# Altium PCB TMC5160_BOB_V1_2.PcbDoc
Units mm, origin at the board's own origin, x right, y up, seen from the top; angles counter-clockwise.
Board outline 36 x 28 mm, 4 copper layers (Top, GND, VM, Bottom), stack 1.64 mm thick; 47 components, 51 nets, 183 pads, 128 vias.
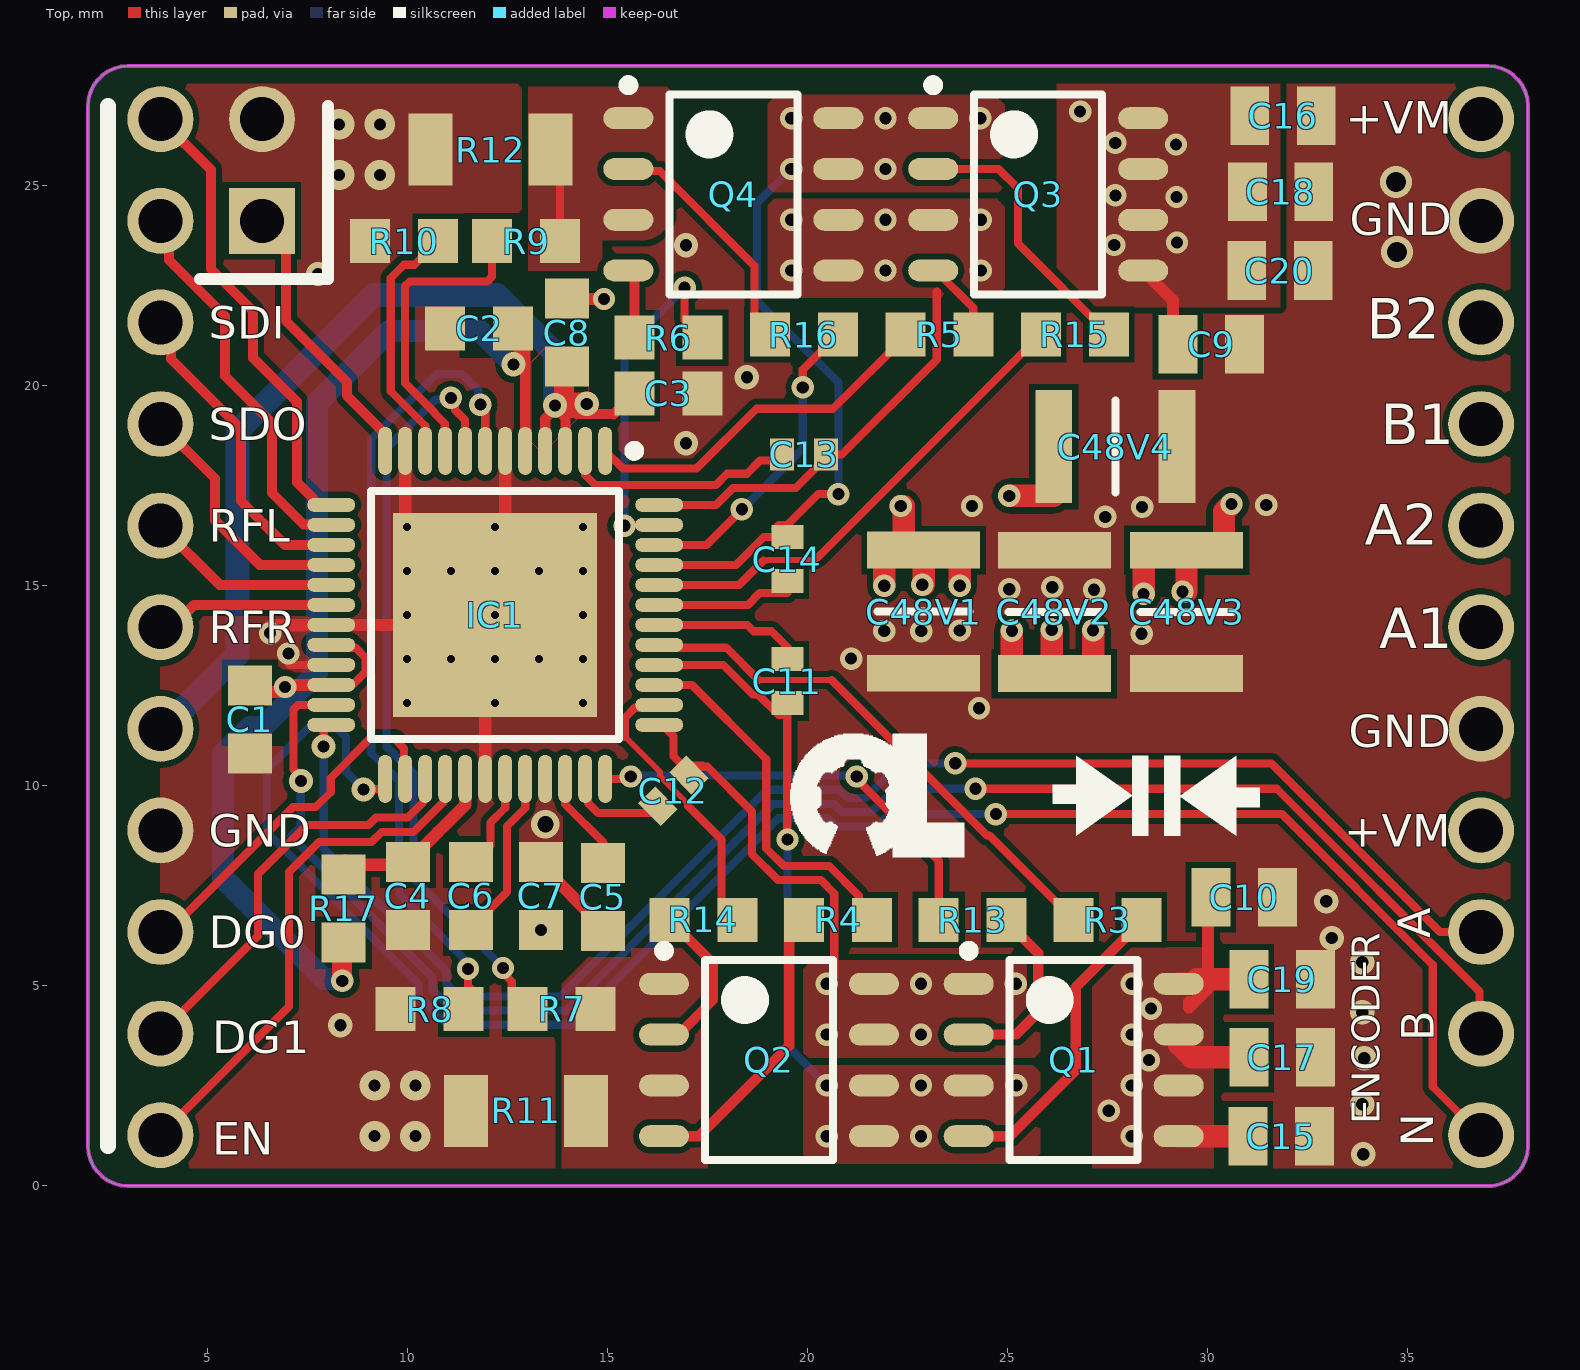
[diagram p0: Top view]
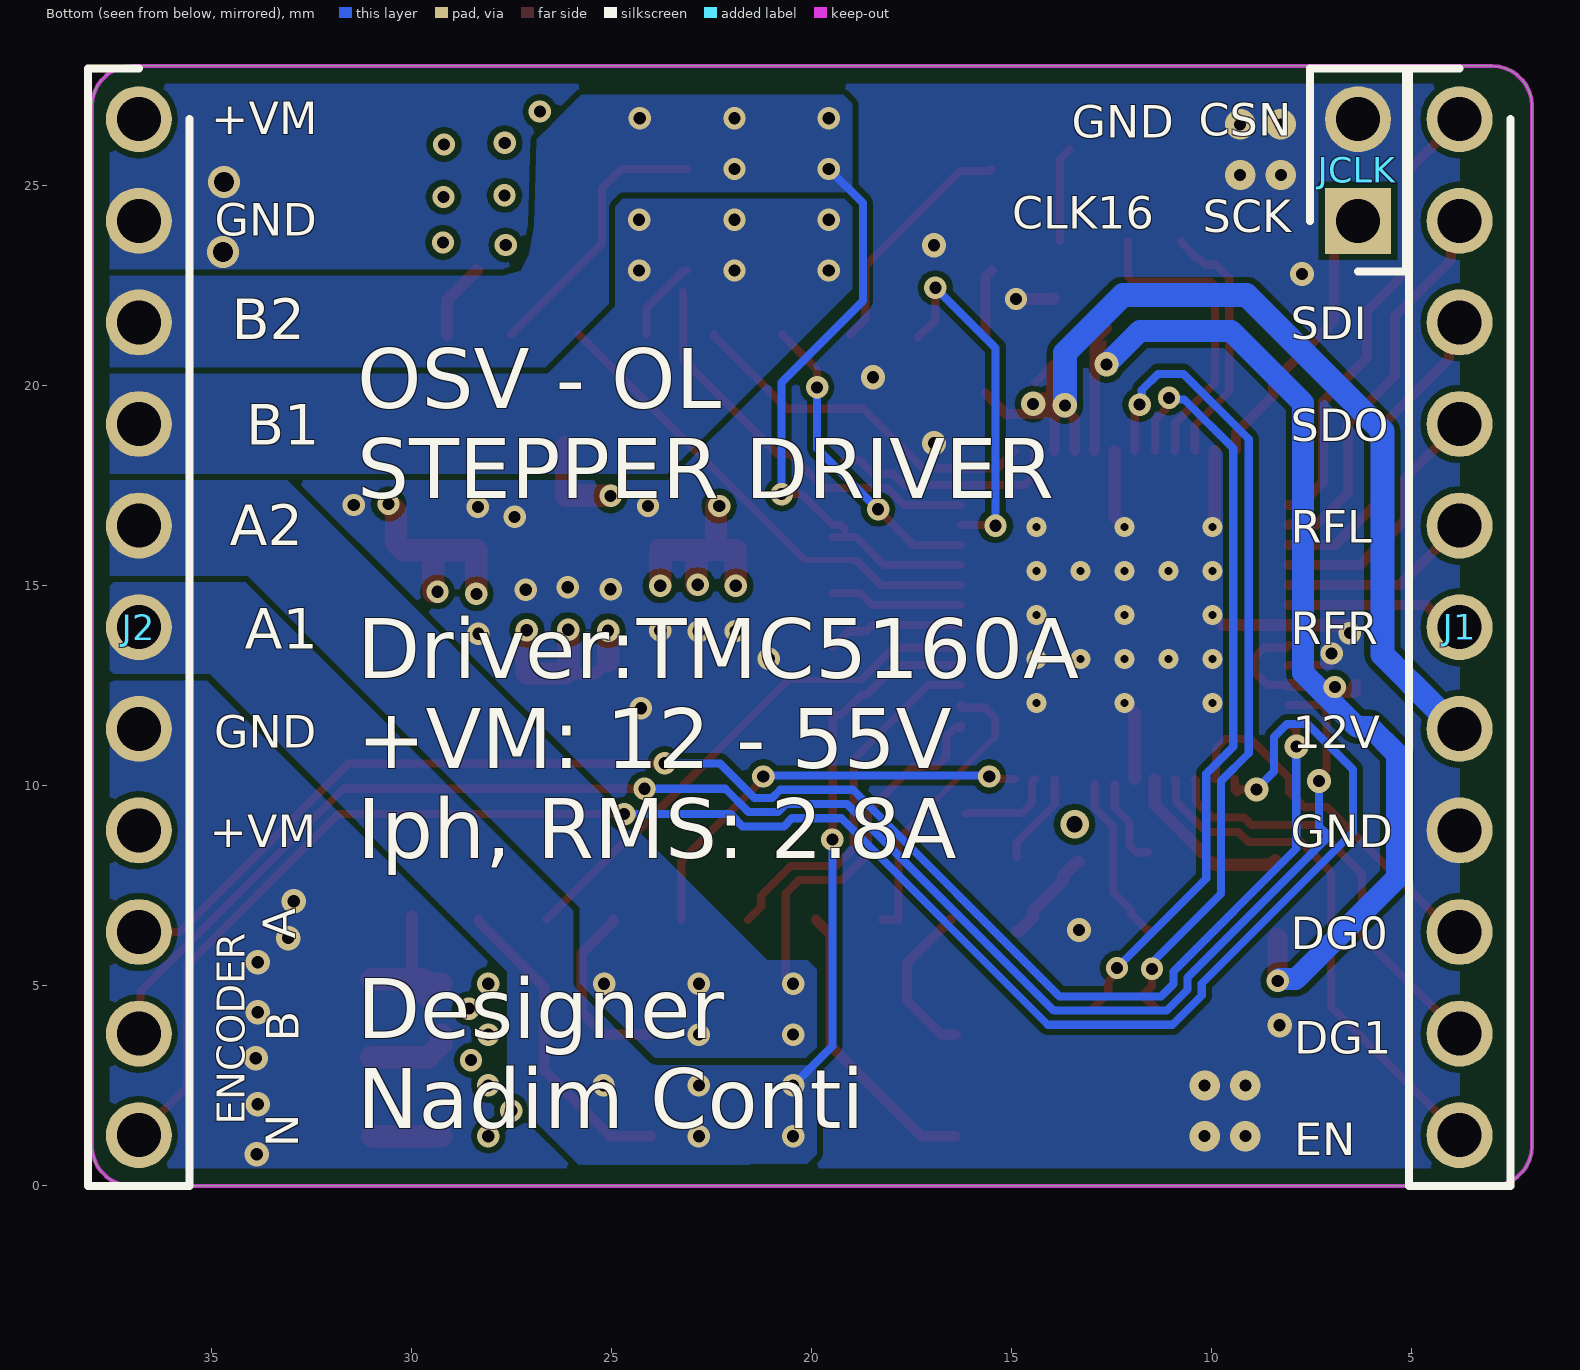
[diagram p1: Bottom view, seen from below]
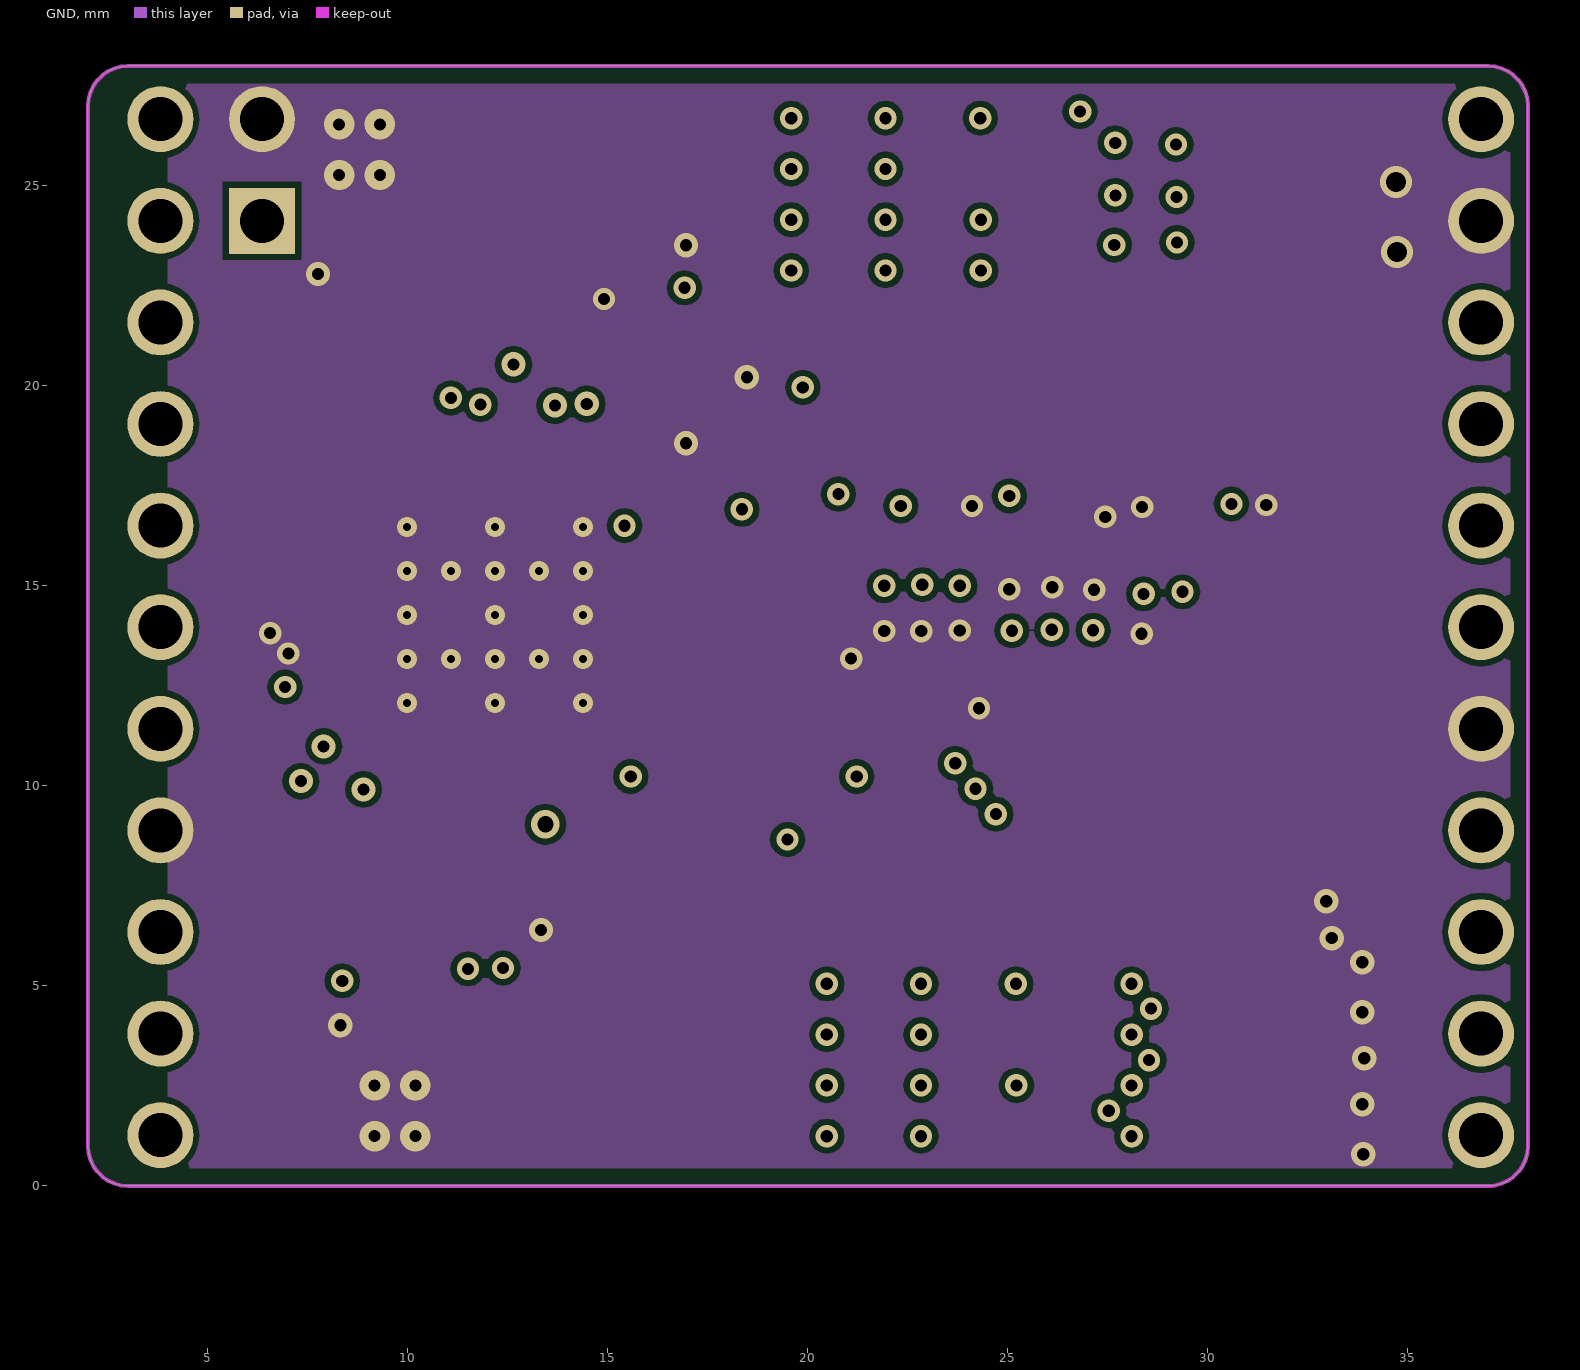
[diagram p2: GND]
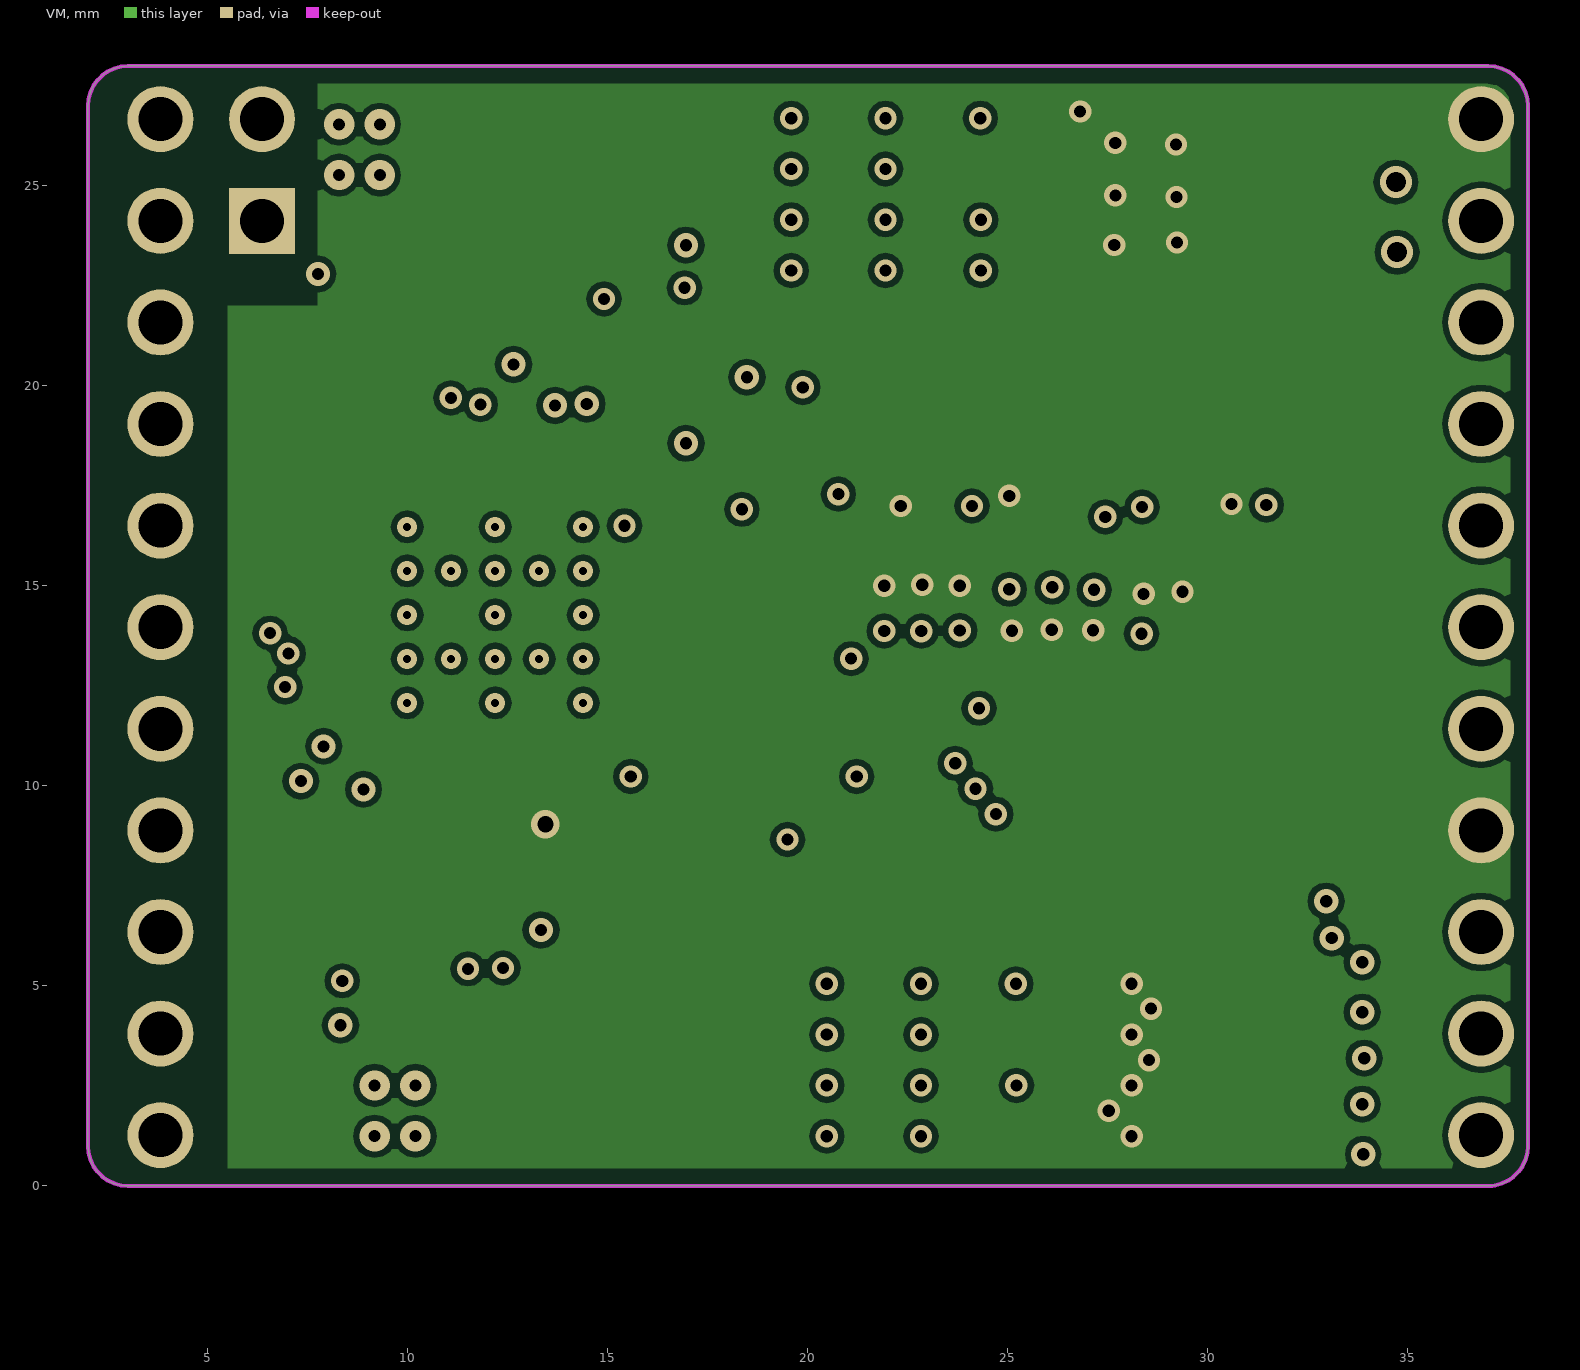
[diagram p3: VM]
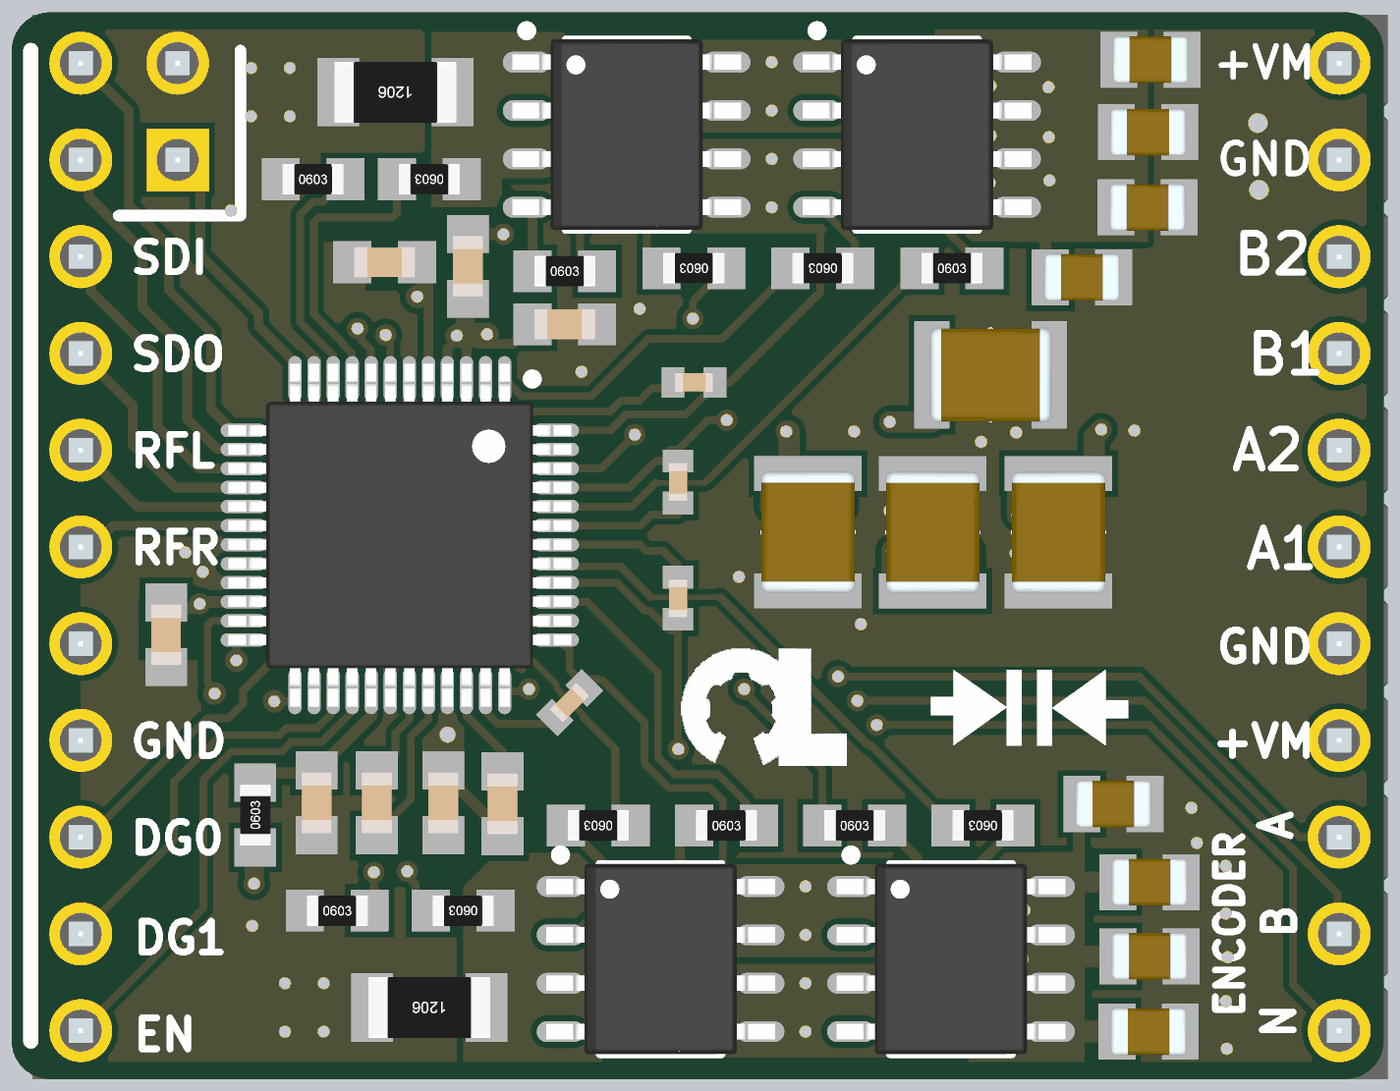
[diagram p4: 3D render of the assembled board from above, using the file's embedded part models]
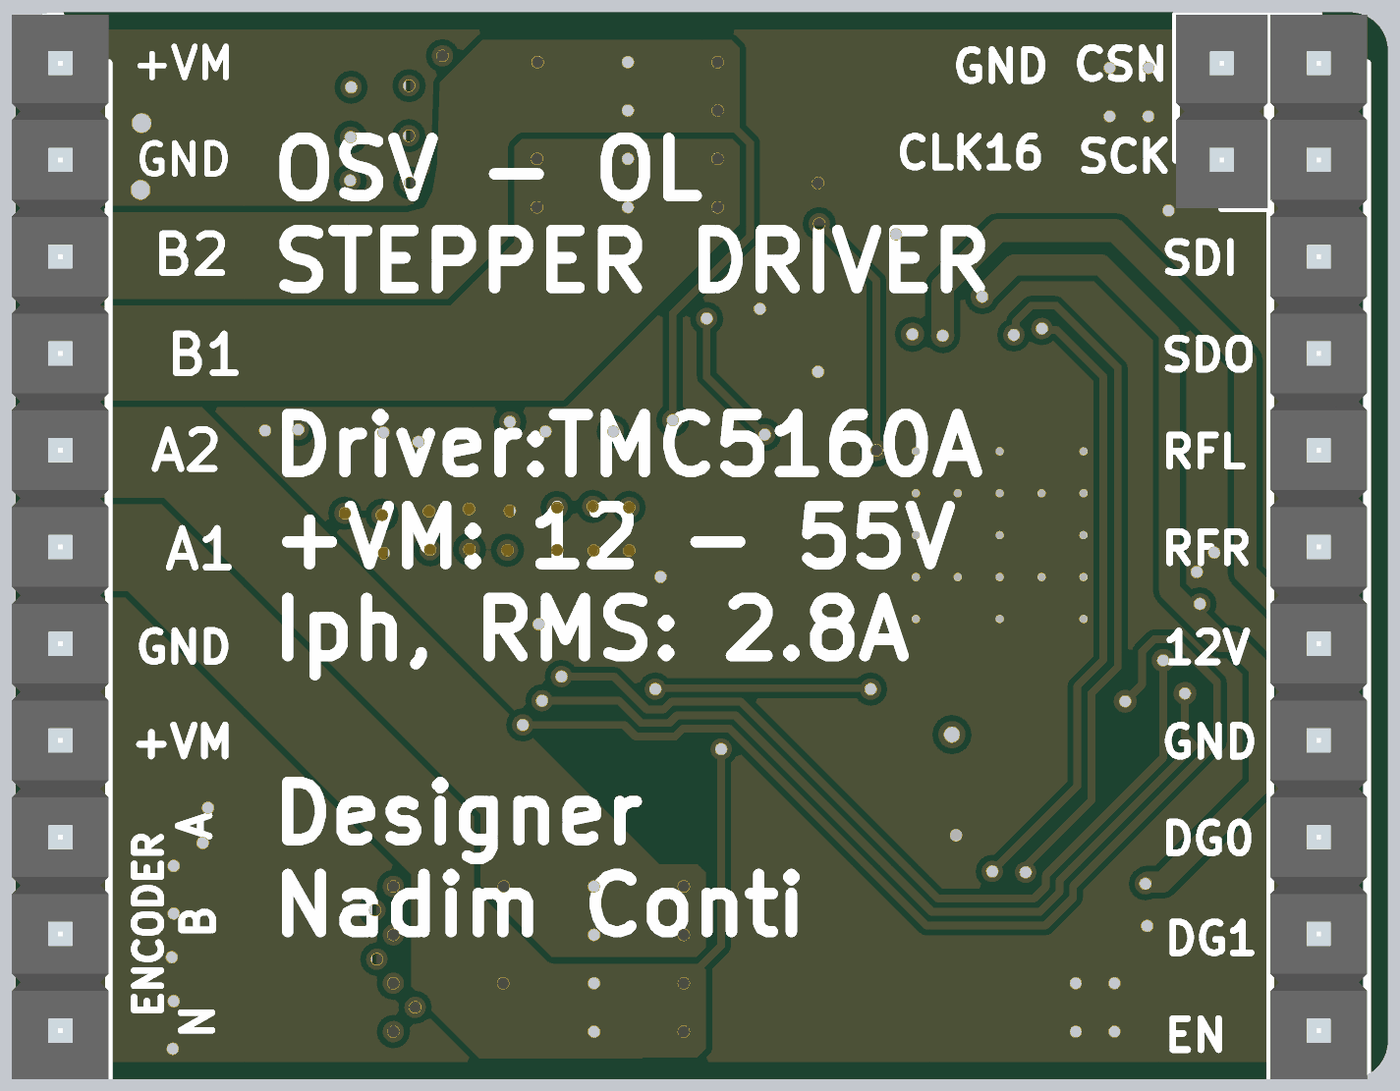
[diagram p5: 3D render of the assembled board from below, using the file's embedded part models]

## Layer stack, top to bottom
Top Solder: solder mask 0.0102, Solder Resist, Dk 3.5
Top: signal copper 0.035
Dielectric 1: core 0.2, FR-4, Dk 4.8
GND: signal copper 0.035
Dielectric 2: prepreg 1.1, FR-4, Dk 4.2
VM: signal copper 0.035
Dielectric4: core 0.2, FR-4, Dk 4.2
Bottom: signal copper 0.035
Bottom Solder: solder mask 0.0102, Solder Resist, Dk 3.5

## Board outline
3,0 cw(c3,1) 2,1 2,27 cw(c3,27) 3,28 37,28 cw(c37,27) 38,27 38,1 cw(c37,1) 37,0

## Design rules (kind name [scope] priority, off if disabled: settings)
Clearance BoardOutlineClearance [OnLayer('Keep-Out Layer')] p1: gap=0.39 ignorepadtopadclearanceinfootprint=FALSE except(0: Arc-Hole Track-Hole SMDPad-Hole THPad-Hole Via-Hole Fill-Hole Poly-Hole Region-Hole Text-Hole; 0.29: Arc-Arc Arc-Track Arc-SMDPad Arc-THPad Track-Track Track-SMDPad Track-THPad SMDPad-THPad THPad-THPad)
Clearance "Fiducial Clearance" [HasFootprint('FIDUCIAL_40MIL')] p2: gap=0.66 ignorepadtopadclearanceinfootprint=FALSE except(0: Arc-Hole Track-Hole SMDPad-Hole THPad-Hole Via-Hole Fill-Hole Poly-Hole Region-Hole Text-Hole)
Clearance "Mounting Hole Clearance" [(HoleDiameter >= 110) And  IsPad  And ((PadYSize_AllLayers - HoleDiameter)  <=  1)] p3: gap=0.762 ignorepadtopadclearanceinfootprint=FALSE except(0: Arc-Hole Track-Hole SMDPad-Hole THPad-Hole Via-Hole Fill-Hole Poly-Hole Region-Hole Text-Hole)
Clearance [All] p4: gap=0.152 ignorepadtopadclearanceinfootprint=TRUE except(0: Arc-Hole Track-Hole SMDPad-Hole THPad-Hole Via-Hole Fill-Hole Poly-Hole Region-Hole Text-Hole)
ComponentClearance Pinheader2PinheaderClearance [InComponentClass('Pinheader') vs InComponentClass('Pinheader')] p1: gap=0 collisioncheckmode=3 verticalgap=0 showdistances=FALSE
ComponentClearance [All] p2: gap=0 collisioncheckmode=3 verticalgap=2540 showdistances=FALSE
DiffPairsRouting [All] p1 off: maxlimit=0.254 minlimit=0.191 mostfreqgap=0.254 toplayer_prefgap=0.191 toplayer_minwidth=0.191 toplayer_maxwidth=0.191 toplayer_prefwidth=0.191 midlayer1_prefgap=0.191 midlayer1_minwidth=0.191 midlayer1_maxwidth=0.191 midlayer1_prefwidth=0.191 midlayer2_mingap=0.254 midlayer2_minwidth=0.381 midlayer2_maxwidth=0.381 midlayer2_prefwidth=0.381 bottomlayer_prefgap=0.191 bottomlayer_minwidth=0.191 bottomlayer_maxwidth=0.191 bottomlayer_prefwidth=0.191 maxuncoupledlength=12.7
HoleSize [All] p1: absolutevalues=TRUE maxlimit=2540 minlimit=0.2 maxpercent=80.000 minpercent=20.000
HoleToHoleClearance [All] p1: gap=0.203 allowstackedmicrovias=TRUE
MatchedLengths "SD_CARD MatchedLengths" [InNetClass('SD_CARD')] p1: tolerance=0.254 checknetsindiffpair=FALSE checkdiffpairvsdiffpair=TRUE checkxsignals=TRUE checkothers=TRUE
MinimumAnnularRing MinimumViaAnnualRing [All] p1: minimumring=0.125
MinimumSolderMaskSliver STM32_MinimumSolderMaskSliver [(InComponent('STM1') AND InComponent('STM2')) vs (InComponent('STM1') AND InComponent('STM2'))] p1: minsoldermaskwidth=0.025
MinimumSolderMaskSliver USB_HUB_MinimumSolderMaskSliver [InComponent('USB_HUB')] p2: minsoldermaskwidth=0.025
MinimumSolderMaskSliver [All] p3 off: minsoldermaskwidth=0.038
PasteMaskExpansion TestPadPasteMaskExpansion [HasFootprint('SMD_TP_2X2_ROUND')] p1: expansion=-2
PasteMaskExpansion [All] p2: expansion=0
PlaneConnect [All] p1: planeconnectstyle=Relief reliefexpansion=0.508 reliefentries=4 reliefconductorwidth=0.3 reliefairgap=0.254
PolygonConnect SA_SB_PolygonConnect [InNet('SA') OR InNet('SB')] p1: connectstyle=Direct reliefconductorwidth=1.778 reliefentries=4 polygonreliefangle="90 Angle" airgapwidth=0.254
PolygonConnect VM_PolygonConnect [InNet('+VM')] p2: connectstyle=Direct reliefconductorwidth=1.778 reliefentries=4 polygonreliefangle="90 Angle" airgapwidth=0.15
PolygonConnect ThermalVias [IsVia] p3: connectstyle=Direct reliefconductorwidth=0.254 reliefentries=4 polygonreliefangle="90 Angle" airgapwidth=0.254
PolygonConnect MotorOutputConStyle [InNetClass('MotorPowerOut')] p4: connectstyle=Direct reliefconductorwidth=0.254 reliefentries=4 polygonreliefangle="90 Angle" airgapwidth=0.254
PolygonConnect [All] p5: connectstyle=Relief reliefconductorwidth=0.381 reliefentries=4 polygonreliefangle="90 Angle" airgapwidth=0.254
RoutingVias [All] p1: holewidth=0.305 width=0.559 viastyle="Through Hole" minholewidth=0.305 minwidth=0.559 maxholewidth=0.305 maxwidth=1.27
ShortCircuit [All] p1 off: allowed=FALSE
SilkToBoardRegionClearance [All] p1 off:
SilkToSilkClearance [All] p1 off: silktosilkclearance=0.254
SilkToSolderMaskClearance [IsPad] p1 off: minsilkscreentomaskgap=0.254 clearancetoexposedcopper=TRUE
SolderMaskExpansion [All] p1: expansion=0 istentingtop=FALSE
UnRoutedNet [All] p1 off:
Width VIN_Width [InNetClass('PWR_VIN')] p1: maxlimit=7.62 minlimit=5.08 preferedwidth=5.334
Width Other_Width [All] p2: maxlimit=2540 minlimit=0.15 preferedwidth=0.3 midlayer1_minwidth=0.203 midlayer2_minwidth=0.203 bottomlayer_minwidth=0.203 minimp=50.000000 maximp=50.000000 favimp=50.000000
18 further rules are at their usual default settings.

## Classes and differential pairs
net class MotorPowerOut: BMA1 BMA2 BMB1 BMB2 GND

## Components (designator, comment, footprint, x,y, rotation, side; value= is the part's Value field where it differs from the comment)
C1 "100nF" C0603 6.049,11.664 r270 top
C2 "2u2" C0603 11.782,21.443 r180 top
C3 "2u2" C0603 16.51,19.812 r180 top
C4 "470nF" C0603 10,7.25 r270 top
C5 "100nF" C0603 14.875,7.225 r90 top
C6 "22nF" C0603 11.575,7.25 r270 top
C7 "100nF" C0603 13.325,7.25 r270 top
C8 "100nF" C0603 13.97,21.336 r90 top
C9 "GRM21BC72A105KE01L" CAPC2012X145N 30.08,21.045 r0 top value=1uF
C10 "GRM21BC72A105KE01L" CAPC2012X145N 30.905,7.22 r0 top value=1uF
C11 "220nF" C0402 19.482,12.624 r270 top
C12 "220nF" C0402 16.636,9.881 r45 top
C13 "220nF" C0402 19.901,18.288 r0 top
C14 "220nF" C0402 19.482,15.672 r90 top
C15 "GRM21BC72A105KE01L" CAPC2012X145N 31.83,1.245 r0 top value=1uF
C16 "GRM21BC72A105KE01L" CAPC2012X145N 31.876,26.758 r0 top value=1uF
C17 "GRM21BC72A105KE01L" CAPC2012X145N 31.855,3.22 r0 top value=1uF
C18 "GRM21BC72A105KE01L" CAPC2012X145N 31.816,24.854 r0 top value=1uF
C19 "GRM21BC72A105KE01L" CAPC2012X145N 31.855,5.17 r0 top value=1uF
C20 "GRM21BC72A105KE01L" CAPC2012X145N 31.8,22.884 r0 top value=1uF
C48V1 "C3225X7R1N106K250AC" CAPC3225X230N 22.891,14.358 r90 top
C48V2 "C3225X7R1N106K250AC" CAPC3225X230N 26.162,14.351 r270 top
C48V3 "C3225X7R1N106K250AC" CAPC3225X230N 29.464,14.351 r90 top
C48V4 "C3225X7R1N106K250AC" CAPC3225X230N 27.683,18.485 r180 top
IC1 "TMC5160-TA" TMC5160_TSQFP50P900X900X120_HS-49L 12.181,14.278 r270 top locked
J1 "PRPC011SFAN-RC" HDRV11W64P254_1X11_2794X254X1058P 3.81,26.67 r270 bottom locked
J2 "PRPC011SFAN-RC" HDRV11W64P254_1X11_2794X254X1058P 36.83,26.67 r270 bottom locked
JCLK "TSW-102-07-F-S" HDRV2W64P254_1X2_508X241X838P 6.35,24.13 r90 bottom
Q1 "CSD88537ND" SOP127P600X170-8L 26.644,3.15 r0 top
Q2 "CSD88537ND" SOP127P600X170-8L 19.024,3.15 r0 top
Q3 "CSD88537ND" SOP127P600X170-8L 25.755,24.79 r0 top
Q4 "CSD88537ND" SOP127P600X170-8L 18.135,24.79 r0 top
R3 "22R / 100mW / 1%" R0603 27.484,6.655 r180 top
R4 "22R / 100mW / 1%" R0603 20.753,6.655 r0 top
R5 "22R / 100mW / 1%" R0603 23.283,21.285 r180 top
R6 "22R / 100mW / 1%" R0603 16.51,21.209 r0 top
R7 "47R /  / 1%" R0603 13.843,4.42 r180 top
R8 "47R /  / 1%" R0603 10.541,4.42 r0 top
R9 "47R /  / 1%" R0603 12.954,23.622 r180 top
R10 "47R /  / 1%" R0603 9.906,23.622 r0 top
R11 "75mR" R1206 12.954,1.88 r180 top
R12 "75mR" R1206 12.065,25.908 r180 top
R13 "22R / 100mW / 1%" R0603 24.118,6.655 r0 top
R14 "22R / 100mW / 1%" R0603 17.387,6.655 r180 top
R15 "22R / 100mW / 1%" R0603 26.67,21.285 r0 top
R16 "22R / 100mW / 1%" R0603 19.897,21.285 r180 top
R17 "2R2/1%/" R0603 8.389,6.932 r90 top

## Footprints (in the part's own frame and the unit in brackets; to place one, negate y for a bottom-side part, rotate by r counter-clockwise, add the part's x,y. Pads: shape width x height; smd on the part's side, far side on the other; paste and mask are expansions set on the pad)
C0402 [mm] "0402 ceramic capacitor"
  rect 0.6x0.8 smd: 1(-0.55,0) 2(0.55,0)
  body extent -0.5,-0.25 0.5,0.25, height 0.5
C0603 [mm] "0603 ceramic capacitor"
  rect 1x1.1 smd: 1(-0.85,0) 2(0.85,0)
  body extent -0.8,-0.4 0.8,0.4, height 0.8
CAPC2012X145N [mm]
  rect 0.97x1.47 smd: 1(-0.83,0) 2(0.83,0)
  body extent -1,-0.63 1,0.63, height 1.45
CAPC3225X230N [mm]
  rect 0.92x2.82 smd: 1(-1.54,0) 2(1.54,0)
  silkscreen extent 0,-1.15 0,1.15, body extent -1.6,-1.25 1.6,1.25, height 2.3
HDRV2W64P254_1X2_508X241X838P [mm]
  rect 1.65x1.65 hole 1.1: 1(0,0)
  round 1.65 hole 1.1: 2(2.54,0)
  silkscreen extent -1.27,-1.2 3.81,1.2, body extent -1.27,-1.2 3.81,1.2, height 8.38
HDRV11W64P254_1X11_2794X254X1058P [mm]
  round 1.65 hole 1.1: 1(0,0) 2(2.54,0) 3(5.08,0) 4(7.62,0) 5(10.16,0) 6(12.7,0) 7(15.24,0) 8(17.78,0) 9(20.32,0) 10(22.86,0) 11(25.4,0)
  silkscreen extent -1.27,-1.27 26.67,1.27, body extent -1.27,-1.27 26.67,1.27, height 10.58
R0603 [mm] "0603 resistor"
  rect 1x1.1 smd: 1(-0.85,0) 2(0.85,0)
  body extent -0.8,-0.4 0.8,0.4, height 0.45
R1206 [mm] "1206 resistor"
  rect 1.1x1.8 smd: 1(-1.5,0) 2(1.5,0)
  body extent -1.6,-0.8 1.6,0.8, height 0.6
SOP127P600X170-8L [mm] "SOP, 8-Leads, Body 4,90x3,90mm, Pitch 1,27mm, IPC High Density"
  oval 1.25x0.55 smd: 1(-2.625,1.905) 2(-2.625,0.635) 3(-2.625,-0.635) 4(-2.625,-1.905) 5(2.625,-1.905) 6(2.625,-0.635) 7(2.625,0.635) 8(2.625,1.905)
  silkscreen extent -2.75,-2.5 1.6,2.85, body extent -3,-2.5 3,2.5, height 1.7
TMC5160_TSQFP50P900X900X120_HS-49L [mm] "TSQFP, 48-Leads, Body 7,00x7,00mm, Pitch 0,50mm, Thermal Pad 5,10x5,10mm, IPC High Density"
  oval 1.2x0.35 smd: 1(-4.1,2.75) 2(-4.1,2.25) 3(-4.1,1.75) 4(-4.1,1.25) 5(-4.1,0.75) 6(-4.1,0.25) 7(-4.1,-0.25) 8(-4.1,-0.75) 9(-4.1,-1.25) 10(-4.1,-1.75) 11(-4.1,-2.25) 12(-4.1,-2.75) 25(4.1,-2.75) 26(4.1,-2.25) 27(4.1,-1.75) 28(4.1,-1.25) 29(4.1,-0.75) 30(4.1,-0.25) 31(4.1,0.25) 32(4.1,0.75) 33(4.1,1.25) 34(4.1,1.75) 35(4.1,2.25) 36(4.1,2.75)
  oval 0.35x1.2 smd: 13(-2.75,-4.1) 14(-2.25,-4.1) 15(-1.75,-4.1) 16(-1.25,-4.1) 17(-0.75,-4.1) 18(-0.25,-4.1) 19(0.25,-4.1) 20(0.75,-4.1) 21(1.25,-4.1) 22(1.75,-4.1) 23(2.25,-4.1) 24(2.75,-4.1) 37(2.75,4.1) 38(2.25,4.1) 39(1.75,4.1) 40(1.25,4.1) 41(0.75,4.1) 42(0.25,4.1) 43(-0.25,4.1) 44(-0.75,4.1) 45(-1.25,4.1) 46(-1.75,4.1) 47(-2.25,4.1) 48(-2.75,4.1)
  rect 5.1x5.1 smd: 49(0,0)
  silkscreen extent -4.22,-3.1 3.1,3.6, body extent -4.5,-4.5 4.5,4.5, height 1.2

## Part data
C1 C5 C7 C8: library part Capacitor, "Cap Ceramic 0.1uF 100V X7R 20% Pad SMD 0603 125C T/R", Dielectric=X7R, Manufacturer=Murata, Manufacturer Part Number=GRM188R72A104MA35D, Supplier Part Number 1=490-16327-1-ND, Tolerance=20%, Voltage Rating (DC)=100V, Capacitance=100nF, Category="Ceramic Capacitors", ComponentLink1Description=http://search.murata.co.jp/Ceramy/image/img/A01X/G101/ENG/GRM188R72A104MA35-01.pdf?src-supplier=Digi-Key, ComponentLink1URL=http://search.murata.co.jp/Ceramy/image/img/A01X/G101/ENG/GRM188R72A104MA35-01.pdf?src-supplier=Digi-Key, ComponentLink2Description=https://search.murata.co.jp/Ceramy/image/img/A01X/G101/ENG/GRM188R72A104MA35-01.pdf?src-supplier=Digi-Key, ComponentLink2URL=https://search.murata.co.jp/Ceramy/image/img/A01X/G101/ENG/GRM188R72A104MA35-01.pdf?src-supplier=Digi-Key, Length=1.6mm, Pricing 1="1=0,28000, 10=0,19100, 100=0,09660, 500=0,06612, 1000=0,05849 (USD)", RoHS=No, Stock 1=19921, Supplier 1=Digi-Key, Thickness=800um, Width=800um
  C1 C7 C8: ComponentLinknDescription=Datasheet
  C5: Type=MLCC
C2 C3: library part "2.2 µF, 25 V, ± 10%, X5R, GRM Series", "SMD Multilayer Ceramic Capacitor, 0603 [1608 Metric], 2.2 µF, 25 V, ± 10%, X5R, GRM Series", MPN=GRM188R61E225KA12D, Voltage Rating=50V, Capacitance=2u2, ComponentLinknDescription=Datasheet, MF=MURATA, Precision=10%, Type=MLCC
C4: library part Capacitor, "Ceramic capacitor", MPN=MC0603X474K160CT, Voltage Rating=16V, Capacitance=470nF, ComponentLinknDescription=Datasheet, MF=Multicomp, Precision=10%, Type=MLCC
C6: library part Capacitor, "Ceramic capacitor", MPN=MC0603B223K500CT, Voltage Rating=50V, Capacitance=22nF, ComponentLinknDescription=Datasheet, MF=Multicomp, Precision=20%, Type=MLCC
C9 C10 C15 C16 C17 C18 C19 C20: "Capacitor", Manufacturer_Name="Murata Electronics", Mouser Part Number=81-GRM21BC72A105KE1L, Datasheet Link=https://psearch.en.murata.com/capacitor/product/GRM21BC72A105KE01%23.html, Height=1.45mm, Manufacturer_Part_Number=GRM21BC72A105KE01L, Mouser Price/Stock=https://www.mouser.com/Search/Refine.aspx?Keyword=81-GRM21BC72A105KE1L
C11 C12 C13 C14: library part "0.22 µF, 50 V, ± 10%, X7R", "CAP CER 0.22UF 100V X7S 0603", Case Code (Imperial)=0603, Case Code (Metric)=1608, Manufacturer="Taiyo Yuden", Manufacturer Part Number=HMK107C7224KAHTE, Max Operating Temperature=125°C, Min Operating Temperature=-55°C, Ratings=AEC-Q200, Supplier Part Number 1=587-5012-1-ND, Tolerance=10%, Voltage Rating=100V, Capacitance=220nF, Case/Package=0603, Category="Ceramic Capacitors", ComponentLink1Description=https://www.yuden.co.jp/productdata/catalog//mlcc11_hq_e.pdf?src-supplier=Digi-Key, ComponentLink1URL=https://www.yuden.co.jp/productdata/catalog//mlcc11_hq_e.pdf?src-supplier=Digi-Key, ComponentLink2Description=http://ds.yuden.co.jp/TYCOMPAS/ut/detail.do?productNo=HMK107C7224KAHTE&fileName=HMK107C7224KAHTE_SS&mode=specSheetDownload&src-supplier=Digi-Key, ComponentLink2URL=http://ds.yuden.co.jp/TYCOMPAS/ut/detail.do?productNo=HMK107C7224KAHTE&fileName=HMK107C7224KAHTE_SS&mode=specSheetDownload&src-supplier=Digi-Key, ComponentLinknDescription=Datasheet, Mount="Surface Mount", Packaging="Cut Tape", Pricing 1="1=0,28000, 10=0,19300, 100=0,10960, 500=0,07738, 1000=0,06772 (USD)", RoHS=No, Stock 1=24916, Supplier 1=Digi-Key
C48V1 C48V2 C48V3 C48V4: "Capacitor", Manufacturer_Name=TDK, Mouser Part Number=810-C3225X7R1N106K25, Datasheet Link=https://product.tdk.com/info/en/catalog/datasheets/mlcc_commercial_midvoltage_en.pdf, Height=2.3mm, Manufacturer_Part_Number=C3225X7R1N106K250AC, Mouser Price/Stock=https://www.mouser.com/Search/Refine.aspx?Keyword=810-C3225X7R1N106K25
IC1: Manufacturer=TRINAMIC, Distributor#1=Digikey, Geometry.Height=1,2mm, MF=TRINAMIC, MPN=TMC5160-TA
J1 J2: "Connector", Manufacturer_Name=Sullins, Datasheet Link=https://media.digikey.com/PDF/Data%20Sheets/Sullins%20PDFs/xRxCzzzSxxN-RC_ST_11635-B.pdf, Height=10.58mm, Manufacturer_Part_Number=PRPC011SFAN-RC
JCLK: "Connector", Manufacturer_Name=SAMTEC, Mouser Part Number=200-TSW10207FS, RS Part Number=1557967, Datasheet Link=http://suddendocs.samtec.com/catalog_english/tsw_th.pdf, Height=8.38mm, Manufacturer_Part_Number=TSW-102-07-F-S, Mouser Price/Stock=https://www.mouser.com/Search/Refine.aspx?Keyword=200-TSW10207FS, RS Price/Stock=http://uk.rs-online.com/web/p/products/1557967
Q1 Q2 Q3 Q4: library part "CSD88537ND MOSFET 2N-CH 60V 15A 8SOIC", "Mosfet Array 2 N-Channel (Dual) 60V 15A 2.1W Surface Mount 8-SOIC", MF="Texas Instruments", MPN=CSD88537ND
R3 R4 R5 R6 R13 R14 R15 R16: library part "22 ohm, 50 V, 0603 [1608 Metric], 100 mW, ± 1%, MCWR Series", "SMD Chip Resistor, Thick Film, 22 ohm, 50 V, 0603 [1608 Metric], 100 mW, ± 1%, MCWR Series", MPN=MCWR06X22R0FTLV, PowerRating=100mW, Resistance=22R, Temp coefficient=*ppm, MF=MULTICOMP, Precision=1%
R7 R8 R9 R10: library part "47 ohm, 75 V, 0603 [1608 Metric], 100 mW, ± 1%, MCSR 06 Series", "SMD Chip Resistor, Ceramic, 47 ohm, 75 V, 0603 [1608 Metric], 100 mW, ± 1%, MCSR 06 Series", MPN=MCSR06X47R0FTL, Resistance=47R, Temp coefficient=*ppm, MF=MULTICOMP, Precision=1%
R11 R12: library part "R_SENS, 0.075 ohm, 1206, 1W, ± 1%, ERJ Series", "SMD Chip Resistor, Thick Film, Current Sense Resistors - SMD 1W 0.075ohm 1%", MPN=ERJ-8BWFR075V, PowerRating=1W, Temp coefficient=*ppm, VoltageRating=50V, MF="Panasonic Electronic Components", Precision=1%, Resistance=75mR
R17: library part Resistor, "Resistor", MPN=MC0063W060312R2, Power Rating=*mW, Resistance=2R2, Temp coefficient=*ppm, Voltage Rating=*V, ComponentLinknDescription=Datasheet, MF=Multicomp, Precision=1%

## Via types
v1: diameter 0.559, hole 0.305, Top to Bottom, tented both sides, 79 vias
v2: diameter 0.5, hole 0.2, Top to Bottom, tented bottom, 19 vias
v3: diameter 0.61, hole 0.305, Top to Bottom, tented both sides, 16 vias
v4: diameter 0.757, hole 0.3, Top to Bottom, tented both sides, 8 vias
v5: diameter 0.6, hole 0.3, Top to Bottom, tented both sides, 3 vias
v6: diameter 0.8, hole 0.5, Top to Bottom, tented both sides, 2 vias
v7: diameter 0.711, hole 0.406, Top to Bottom, tented both sides, 1 vias

## Nets (pads, with @x,y where several pads share a name; then routed paths per layer and width w, separated by ;. In a path a pad name is that pad's centre, name@x,y a point inside that pad or via, vN(x,y) a via of type N, cw(c..) or ccw(c..) an arc to the next point about the centre after c; other vN are vias at no path point)
5V_OUT: C1.1 C2.1 IC1.5 IC1.20 IC1.22 R17.1 | length 31.7
  Top w0.203: IC1.22 8.613,12.528 8.935,12.851 8.935,13.206 8.684,13.457 8.152,13.457 IC1.20
  Top w0.254: R17.1@8.357,6.201 R17.1@8.431,6.275 ; C2.1 12.931,21.143 12.931,20.54 IC1.5
  Top w0.305: C1.1@6.432,12.528 6.432,12.367 6.447,12.353 6.884,12.353 7.06,12.528 IC1.22
  Top w0.5: v1(8.357,5.127) R17.1@8.357,6.201
  Bottom w0.55: v1@8.355,5.129 8.353,5.129 8.313,5.169 7.906,5.169 5.375,7.7 5.375,10.8 6.055,11.48 6.328,11.48 6.329,11.482 6.379,11.482 7.725,12.828 7.725,19.575 9.525,21.375 11.803,21.375 v3(12.638,20.54)
  other v1: 6.928,12.473
+12V: C3.2 C8.1 IC1.3 IC1.4 J1.7 | length 24.6
  Top w0.203: v3@13.639,19.47 v3@13.639,19.5 ; v3(13.677,19.514) 13.903,19.741 ; C8.1@13.903,20.419 C8.1 14.02,20.486 C8.1@14.418,20.088 ; v3@14.432,19.591 v3(14.471,19.552)
  Top w0.253: IC1.4 13.431,19.188 13.639,19.396 v3@13.639,19.47
  Top w0.254: v3@13.639,19.5 13.936,19.203 IC1.3@13.936,18.378 ; 14.218,19.298 15.136,19.298 15.141,19.293 C3.2
  Top w0.5: 13.903,19.741 C8.1@13.903,20.419
  Bottom w0.6: J1.7@4.369,11.919 5.739,13.289 5.739,18.872 9.142,22.275 12.225,22.275 13.677,20.823 v3(13.677,19.514)
+VM: C5.1 C7.1 C9.1 C10.1 C15.1 C16.1 C17.1 C18.1 C19.1 C20.1 C48V1.2 C48V2.2 C48V3.2 C48V4.2 IC1.33 J2.1 J2.8 Q1.5 Q1.6 Q1.7 Q1.8 Q3.5 Q3.6 Q3.7 Q3.8 | length 31.2
  Top w0.305: C7.1 13.375,8.1 13.723,7.752 13.723,7.63 14.477,6.875 14.477,6.723 14.825,6.375 C5.1 ; C48V2.2@25.097,13.119 25.405,12.811 C48V2.2 C48V2.2@26.094,12.879 ; Q3.5 29.122,22.143 C9.1@29.122,21.285 ; 29.523,4.597 29.523,4.47 29.999,4.947 29.999,5.17 C10.1@29.999,6.731
  Top w0.559: v1(21.906,15.004) 21.906,15.898 C48V1.2@22.399,15.898 ; v1(22.321,17) 22.399,17 C48V1.2@22.399,15.898 ; v1(22.857,15.031) 22.891,15.031 C48V1.2 ; v1(23.794,15.004) 23.794,15.898 C48V1.2 ; v1(25.034,17.252) 26.143,17.252 C48V4.2 ; C48V2.2@25.097,13.119 v1(25.097,13.882) ; C48V2.2@26.094,12.879 v1(26.094,13.907) ; C48V2.2 27.129,12.811 v1(27.129,13.894) ; v1(28.391,14.803) 28.391,15.891 C48V3.2 ; Q1.5 C15.1 ; Q1.7 29.269,3.547 29.596,3.22 C17.1 ; Q1.8 29.61,5.055 29.725,5.17 29.999,5.17 C19.1 ; v1(29.363,14.854) 29.464,14.854 C48V3.2 ; v1(30.587,17.05) 30.399,16.862 30.399,16.071 30.218,15.891 C48V3.2 ; C48V1.2@22.399,15.898 C48V1.2
  other v1: 28.091,1.245 27.52,1.883 28.091,2.515 28.525,3.146 28.091,3.785 28.575,4.434 28.091,5.055 27.658,23.526 29.226,23.589 29.213,24.725 27.686,24.765 29.201,26.037 27.681,26.078 26.802,26.861
  other v7: 13.435,9.042
BMA1: C11.2 IC1.40 J2.6 Q1.3 Q2.5 Q2.6 | length 13.4
  Top w0.203: IC1.40 17.883,13.028 18.62,12.291 18.753,12.291 19.27,11.774 19.482,11.774 19.482,8.669 v1(19.49,8.661)
  Bottom w0.203: v1(19.49,8.661) 19.49,3.496 v1(20.471,2.515)
  other v1: 20.471,1.245 22.827,1.245 22.827,2.515 25.211,2.515
BMA2: C12.2 IC1.37 J2.5 Q1.1 Q2.7 Q2.8 | length 9.5
  Top w0.203: IC1.37 16.281,11.455 16.429,11.455 16.637,11.247 16.637,10.744 16.874,10.507 17.237,10.507 17.365,10.507 ; 17.237,10.482 17.365,10.482 17.485,10.482 18.601,9.366 18.601,8.293 19.249,7.645 20.321,7.645 20.657,7.31 20.657,5.24 v1(20.471,5.055)
  other v1: 20.471,3.785 22.827,3.785 22.827,5.055 25.197,5.055
BMB1: C13.2 IC1.48 J2.4 Q3.3 Q4.5 Q4.6 | length 10.1
  Top w0.203: IC1.48 17.704,17.028 18.126,17.45 19.694,17.45 20.532,18.288 20.751,18.288 20.845,18.288 23.221,20.663 23.221,22.356
  other v1: 19.582,22.885 21.938,22.885 24.322,22.885 19.582,24.155 21.938,24.155 24.322,24.155
BMB2: C14.2 IC1.45 J2.3 Q3.1 Q4.7 Q4.8 | length 14.8
  Top w0.203: IC1.45 18.2,15.528 18.894,16.222 C14.2 ; C14.2@19.176,16.428 19.27,16.522 19.482,16.522 20.257,17.297 v1(20.76,17.297)
  Bottom w0.203: v1(19.582,25.425) 18.728,24.571 18.728,22.123 20.76,20.091 v1(20.76,17.297)
  other v1: 21.938,25.425 19.582,26.695 21.938,26.695 24.308,26.695
CA1: C11.1 IC1.42 | length 3.4
  Top w0.203: IC1.42 18.482,14.028 18.642,13.868 19.087,13.868 19.482,13.474
CA2: C12.1 IC1.35 | length 2.4
  Top w0.203: IC1.35 14.502,10.107 14.502,9.576 14.754,9.324 16.144,9.324 C12.1@16.163,9.305
CB1: C13.1 IC1.2 | length 5.7
  Top w0.203: IC1.2 14.431,17.775 14.682,17.524 17.697,17.524 17.979,17.805 18.474,17.805 18.804,18.136 C13.1@19.201,18.136
CB2: C14.1 IC1.43 | length 3.3
  Top w0.203: IC1.43 18.499,14.528 18.792,14.822 19.482,14.822
CLK16: IC1.12 JCLK.1 | length 7
  Top w0.254: JCLK.1 6.95,23.53 6.95,21.625 8.475,20.1 8.475,19.76 9.4,18.835 9.4,18.41 IC1.12
CSN: IC1.13 J1.1 | length 11.6
  Top w0.254: J1.1 5.075,25.405 5.075,22.925 6.125,21.875 6.125,20.708 7.225,19.608 7.225,17.59 7.638,17.177 7.638,17.073 7.682,17.028 IC1.13
DIAG0: IC1.26 J1.9 | length 9.3
  Top w0.203: J1.9@3.65,6.35 J1.9@3.73,6.43 ; J1.9 4.002,6.35 7.122,9.47 7.695,9.47 8.068,9.844 8.068,10.203 9.035,11.17 9.669,11.17 9.903,10.935 9.903,10.206 IC1.26
DIAG1: IC1.27 J1.10 | length 10.5
  Top w0.203: J1.10 6.25,6.25 6.25,7.8 7.475,9.025 9.013,9.025 9.197,9.21 9.995,9.21 10.36,9.576 10.36,9.578 10.403,9.621 10.403,10.15 IC1.27
DRV_ENN: IC1.28 J1.11 | length 13.1
  Top w0.203: J1.11 7.025,4.485 7.025,7.85 7.775,8.6 9.091,8.6 9.345,8.854 10.142,8.854 10.903,9.616 10.903,10.15 IC1.28
ENCA: IC1.24 J2.9 | length 38.2
  Top w0.203: v5(7.893,10.991) 7.893,11.404 8.017,11.528 IC1.24 ; v1(23.681,10.566) 31.587,10.566 35.804,6.35 J2.9
  Bottom w0.203: v5(7.893,10.991) 7.893,8.434 10.967,5.36 10.967,5.054 11.279,4.742 13.81,4.742 18.974,9.906 20.793,9.906 20.996,9.703 21.438,9.703 22.302,10.566 v1(23.681,10.566)
ENCB: IC1.23 J2.10 | length 41.7
  Top w0.203: v5(7.32,10.123) 7.32,10.231 7.135,10.416 7.135,11.909 7.254,12.028 IC1.23 ; v1(24.189,9.931) 31.72,9.931 36.786,4.865 36.786,3.854 J2.10
  Bottom w0.203: v5(7.32,10.123) 7.32,8.99 7.077,8.747 10.611,5.213 10.611,4.907 11.132,4.386 13.957,4.386 19.122,9.55 20.646,9.55 20.849,9.347 21.585,9.347 22.169,9.931 v1(24.189,9.931)
ENCN: IC1.25 J2.11 | length 46.5
  Top w0.203: v5(8.888,9.917) 9.364,9.917 9.431,9.985 IC1.25 ; IC1.25@9.366,9.834 IC1.25@9.431,9.9 ; v1(24.697,9.296) 31.852,9.296 35.619,5.529 35.619,2.481 J2.11
  Bottom w0.203: v5(8.888,9.917) 8.447,10.358 8.447,11.221 8.122,11.545 7.608,11.545 6.478,10.416 6.478,8.843 10.255,5.066 10.255,4.759 10.984,4.03 14.104,4.03 19.269,9.195 20.498,9.195 20.702,8.992 21.733,8.992 22.037,9.296 v1(24.697,9.296)
GND: C1.2 C2.2 C3.1 C4.2 C7.2 C8.2 C9.2 C10.2 C15.2 C16.2 C17.2 C18.2 C19.2 C20.2 C48V1.1 C48V2.1 C48V3.1 C48V4.1 IC1.6 IC1.11 IC1.19 IC1.21 IC1.30 IC1.49 J1.8 J2.2 J2.7 JCLK.2 R8.1 R10.1 R11.2 R12.2 | length 12.2
  Top w0.203: v1(7.01,13.312) 7.01,13.055 7.036,13.028 IC1.21 IC1.21@8.112,12.998
  Top w0.305: v1(6.553,13.821) 6.553,14.003 6.569,14.02 8.073,14.02 IC1.19 9.731,14.028 v2(9.981,14.278) ; IC1.11 9.931,16.528 v2(9.981,16.478) ; C2.2 C2.2@11.086,21.288 ; IC1.30 11.931,11.828 v2(12.181,12.078) ; v2(12.181,16.478) 12.431,16.728 IC1.6 ; C8.2 13.98,22.176 v1(14.901,22.176)
  other v1: 24.277,11.943 21.079,13.184 28.34,13.806 21.906,13.873 22.833,13.872 23.794,13.887 25.034,14.917 27.154,14.904 26.107,14.967 27.434,16.727 28.353,16.974 24.1,17 31.458,17.025
  other v2: 9.981,12.078 14.381,12.078 9.981,13.178 11.081,13.178 12.181,13.178 13.281,13.178 14.381,13.178 12.181,14.278 14.381,14.278 9.981,15.378 11.081,15.378 12.181,15.378 13.281,15.378 14.381,15.378 14.381,16.478
  other v3: 33.88,0.795 33.855,2.045 33.905,3.195 8.31,4.019 33.855,4.345 33.855,5.595 33.093,6.198 13.325,6.4 32.955,7.12 16.95,18.567 18.474,20.218 7.75,22.8 16.95,23.52
  other v4: 9.168,1.245 10.184,1.245 9.168,2.515 10.184,2.515 8.279,25.273 9.295,25.273 8.279,26.543 9.295,26.543
  other v6: 34.726,23.343 34.697,25.096
HA1: IC1.41 R3.2 | length 13.2
  Top w0.15: 18.768,12.646 20.593,12.646
  Top w0.203: IC1.41 16.352,13.457 17.957,13.457 18.768,12.646 ; 20.593,12.646 24.476,8.763 24.535,8.763 26.634,6.664 R3.2
HA2: IC1.36 R13.1 | length 10.8
  Top w0.203: IC1.36 15.511,10.178 v1(15.569,10.236) ; v1(21.217,10.236) 21.217,10.176 23.268,8.125 R13.1
  Bottom w0.203: v1(15.569,10.236) 15.594,10.262 21.192,10.262 v1(21.217,10.236)
HB1: IC1.1 R5.2 | length 9.1
  Top w0.203: IC1.1 15.377,17.932 17.214,17.932 18.713,19.431 20.629,19.431 22.433,21.235 R5.2
HB2: IC1.44 R15.1 | length 12.1
  Top w0.15: 18.891,15.64 18.978,15.64 18.988,15.649 20.184,15.649 20.265,15.73
  Top w0.203: IC1.44 18.279,15.028 18.891,15.64 ; 20.265,15.73 R15.1
LA1: IC1.39 R4.2 | length 9.2
  Top w0.203: IC1.39 17.098,12.528 18.956,10.669 18.956,8.44 19.396,8.001 20.531,8.001 21.268,7.264 21.268,6.99 R4.2
LA2: IC1.38 R14.1 | length 7.5
  Top w0.15: 15.427,11.225 16.302,10.35 16.302,10.246 17,9.548 17,9.5
  Top w0.2: 17,9.5 17.839,8.661
  Top w0.203: 15.427,11.225 15.427,11.706 15.679,11.957 16.281,11.957 IC1.38 ; 17.839,8.661 17.839,6.655 R14.1
LB1: IC1.47 R6.2 | length 9
  Top w0.203: v1(15.413,16.506) 15.329,16.506 15.308,16.528 IC1.47 ; v1@16.915,22.377 16.915,21.654 R6.2
  Bottom w0.203: v1(15.413,16.506) 15.413,20.952 v1(16.915,22.454)
LB2: IC1.46 R16.1 | length 7.8
  Top w0.203: IC1.46 17.459,16.028 v1(18.347,16.916) ; v1(19.871,19.964) 19.871,20.409 R16.1
  Bottom w0.203: v1(18.347,16.916) 19.871,18.44 v1(19.871,19.964)
NetC5_2: C5.2 IC1.34 | length 2.4
  Top w0.203: IC1.34 13.931,9.537 14.884,8.584 C5.2@14.884,8.216
NetC6_1: C6.1 IC1.31 | length 2.2
  Top w0.203: C6.1@11.599,8.343 11.899,8.343 12.065,8.509 12.065,9.088 12.431,9.455 IC1.31@12.431,10.051
NetC6_2: C6.2 IC1.32 | length 4.2
  Top w0.203: C6.2 11.625,6.4 12.023,6.798 12.023,6.898 12.473,7.348 12.473,8.994 12.931,9.452 IC1.32@12.931,10.051
NetQ1_2: Q1.2 R13.2 | length 4.6
  Top w0.254: Q1.2 25.195,3.785 25.755,4.345 25.755,5.818 24.968,6.605 R13.2
NetQ1_4: Q1.4 R3.1 | length 7.8
  Top w0.254: Q1.4 25.043,1.245 26.694,2.896 26.694,4.965 28.334,6.605 R3.1
NetQ2_2: Q2.2 R14.2 | length 4
  Top w0.254: Q2.2 16.764,3.785 17.628,4.648 17.628,5.564 R14.2
NetQ2_4: Q2.4 R4.1 | length 7.4
  Top w0.254: Q2.4 17.272,1.245 19.531,3.504 19.531,6.283 R4.1
NetQ3_2: Q3.2 R15.2 | length 6.9
  Top w0.203: Q3.2 24.764,25.425 25.246,24.943 25.246,23.559 R15.2
NetQ3_4: Q3.4 R5.1 | length 2.1
  Top w0.203: Q3.4 23.195,22.885 24.133,21.947 R5.1
NetQ4_2: Q4.2 R16.2 | length 6
  Top w0.203: Q4.2 15.561,25.375 16.295,25.375 18.668,23.002 18.668,21.664 R16.2
NetQ4_4: Q4.4 R6.1 | length 1.7
  Top w0.254: Q4.4 15.66,22.735 R6.1@15.66,21.285
REFL: IC1.17 J1.5 | length 4.9
  Top w0.254: J1.5 5.292,15.028 IC1.17
REFR: IC1.18 J1.6 | length 4.5
  Top w0.254: J1.6 4.099,13.97 4.657,14.528 IC1.18
SA: Q2.1 Q2.3 R7.1 R11.1
SB: Q4.1 Q4.3 R9.1 R12.1 | length 2.4
  Top w0.203: R12.1 13.804,25.669 R9.1
SCK: IC1.14 J1.2 | length 9.8
  Top w0.254: J1.2 4.026,23.914 4.026,23.149 5.425,21.75 5.425,20.25 6.6,19.075 6.6,17.325 7.387,16.538 8.072,16.538 IC1.14
SDI: IC1.15 J1.3 | length 8
  Top w0.254: J1.3 4.077,21.323 4.077,20.673 5.825,18.925 5.825,17.125 6.922,16.028 IC1.15
SDO: IC1.16 J1.4 | length 6.3
  Top w0.254: J1.4 5.175,17.685 5.175,16.645 6.291,15.528 IC1.16
SRAH: IC1.8 R7.2 | length 19.2
  Top w0.203: v1(11.073,19.702) 11.174,19.601 11.174,19.399 11.421,19.152 11.421,18.388 IC1.8 ; v1(12.376,5.45) 12.259,5.45 12.595,5.115 12.595,4.818 R7.2
  Bottom w0.203: v1(11.073,19.702) 11.034,19.663 10.693,19.663 9.467,18.437 9.467,10.989 10.142,10.313 10.142,7.694 12.356,5.479 12.376,5.46 v1(12.376,5.45)
SRAL: IC1.7 R8.2 | length 20.6
  Top w0.203: R8.2 11.733,4.762 11.5,4.995 v1(11.5,5.428) ; v1(11.81,19.533) 11.81,19.437 11.931,19.315 IC1.7
  Bottom w0.203: v1(11.5,5.428) 11.5,5.581 9.775,7.306 9.775,10.125 9.081,10.819 9.081,18.67 10.715,20.303 11.351,20.303 11.755,19.899 11.755,19.588 v1(11.81,19.533)
SRBH: IC1.9 R9.2 | length 7.7
  Top w0.203: IC1.9 10.92,18.39 10.92,19.064 10.678,19.305 10.678,19.32 9.925,20.073 9.925,22.496 10.044,22.615 11.985,22.615 12.104,22.735 R9.2
SRBL: IC1.10 R10.2 | length 6.3
  Top w0.203: IC1.10 10.431,19.007 9.569,19.869 9.569,22.703 9.897,23.031 10.165,23.031 10.308,23.174 10.358,23.174 10.756,23.572 R10.2
VCC: C4.1 IC1.29 R17.2 | length 4
  Top w0.305: R17.2@8.425,8.15 8.543,8.032 9.932,8.032 C4.1 ; C4.1@10.248,8.343 10.745,8.84 10.745,8.842 10.923,9.021 10.926,9.021 11.431,9.526 IC1.29

## Polygon pours and split planes (outlines as drawn)
GND on Top "GND_L01_P035" (solid, pour order 97): 2,1 2,27 cw(c3,27) 3,28 37,28 cw(c37,27) 38,27 38,1 cw(c37,1) 37,0 3,0 cw(c3,1)
BMB1 on Top "BMB1_L01_P035" (solid, pour order 92): 19.171,24.689 18.998,24.516 18.998,22.428 19.226,22.2 24.662,22.2 24.916,22.454 24.916,24.486 24.713,24.689
SB on Top "SB_L01_P043" (solid, pour order 93): 13.003,27.483 13.003,22.885 14.858,22.885 14.858,23.647 15.874,23.647 ccw(c15.874,24.328) 16.554,24.328 16.554,27.483
SA on Top "SA_L01_P042" (solid, pour order 96): 13.842,0 13.842,5.053 14.728,5.94 16.849,5.94 17.499,5.29 17.499,0
BMB2 on Top "BMB1_L01_P035" (solid, pour order 89): 19.222,27.28 18.998,27.056 18.998,24.968 19.125,24.841 24.764,24.841 24.916,24.994 24.916,27.026 24.662,27.28
BMA2 on Top "BMB1_L01_P035" (solid, pour order 90): 20.111,5.639 19.887,5.415 19.887,3.327 20.014,3.2 25.653,3.2 25.805,3.353 25.805,5.385 25.551,5.639
BMA1 on Top "BMB1_L01_P035" (solid, pour order 91): 20.035,3.023 19.887,2.875 19.887,0.787 20.115,0.559 25.551,0.559 25.805,0.813 25.805,2.845 25.627,3.023
+VM on Top "+VM_L01_P038" (solid, pour order 94): 26.221,27.94 26.221,22.951 27.2,21.971 31.809,21.971 31.809,27.94
+VM on Top "+VM_L01_P038" (solid, pour order 95): 27.11,0 27.11,4.989 28.089,5.969 30.148,5.969 30.148,0
+VM on Top "+VM_L01_P039" (solid, pour order 87): 13.431,10.178 12.776,9.523 12.776,8.103 13.843,8.103 13.868,8.128 13.868,9.741
+VM on Top "+VM_L01_P037" (solid, pour order 88): 13.431,18.378 13.296,18.378 13.081,18.593 13.081,20.599 13.437,20.955 14.376,20.955 14.503,20.828 14.503,19.583 14.218,19.298 14.218,19.165
GND on Bottom "GND_L04_P039" (solid, pour order 108): 2,1 2,27 cw(c3,27) 3,28 37,28 cw(c37,27) 38,27 38,1 cw(c37,1) 37,0 3,0 cw(c3,1)
BMB2 on Bottom "BMB2_L04_P107" (solid, pour order 107): 38.1,22.758 27.727,22.758 27.284,22.88 27.067,23.305 26.946,24.008 26.875,26.168 25.764,27.28 24.24,27.28 24.764,26.756 24.764,22.311 26.602,20.472 38.1,20.472
BMA1 on Bottom "BMA1_L04_P106" (solid, pour order 106): 38.1,12.802 35.06,12.802 27.618,5.359 27.618,2.319 25.832,0.533 21.395,0.533 25.586,4.724 25.586,6.502 34.171,15.088 38.1,15.088
BMA2 on Bottom "BMA2_L04_P105" (solid, pour order 105): 25.805,5.385 25.805,6.955 34.103,15.253 38.087,15.253 38.1,15.265 38.1,17.678 33.154,17.678 21.114,5.639 20.111,5.639 21.965,3.785 24.265,3.785 24.951,4.47
BMB1 on Bottom "BMB1_L04_P103" (solid, pour order 103): 18.998,22.43 23.623,17.805 38.1,17.805 38.1,20.345 38.062,20.307 26.602,20.307 24.916,21.993 24.916,22.936
BMA1 on Bottom "BMB1_L01_P035" (solid, pour order 102): 20.035,3.023 19.887,2.875 19.887,0.787 20.115,0.559 25.551,0.559 25.805,0.813 25.805,2.845 25.627,3.023
BMA2 on Bottom "BMB1_L01_P035" (solid, pour order 101): 20.111,5.639 19.887,5.415 19.887,3.327 20.014,3.2 23.935,3.2 25.805,5.071 25.805,5.385 25.551,5.639
BMB2 on Bottom "BMB1_L01_P035" (solid, pour order 100): 19.222,27.28 18.998,27.056 18.998,24.968 19.125,24.841 24.764,24.841 24.916,24.994 24.916,27.026 24.662,27.28
BMB1 on Bottom "BMB1_L01_P035" (solid, pour order 104): 19.171,24.689 18.998,24.516 18.998,22.428 19.226,22.2 24.662,22.2 24.916,22.454 24.916,24.486 24.713,24.689
GND on GND "GND_L02_P037" (solid, pour order 98): 2,1 2,27 cw(c3,27) 3,28 37,28 cw(c37,27) 38,27 38,1 cw(c37,1) 37,0 3,0 cw(c3,1)
+VM on VM "+VM_L03_P050" (solid, pour order 99): 5.489,0.001 5.489,27.941 37.112,27.941 cw(c37.112,26.941) 38.112,26.941 38.112,1.001 cw(c37.112,1.001) 37.112,0.001

## Keep-outs
Keep-Out Layer:
  lines w0.1: 2,27 2,1 ; 2,1 2,1
  lines w0.102: 2,1 ccw(c3,1) 3,0 37.1,0 ; 2,27 cw(c3,27) 3,28 37,28 cw(c37,27) 38,27 38,1 cw(c37,1) 37,0

## Other copper
Top:
  rectangle net 5V_OUT: 12.638,20.54 12.931,21.143
  rectangle net +12V: 13.639,19.2 14.471,19.842
  pour cut-out: 5.327,12.631 5.327,10.99 6.942,10.99 6.942,12.753
  pour cut-out: 5.347,13.167
  pour cut-out: 2,28 3.81,28 3.81,0 2,0
  pour cut-out: 12.331,21.999 12.331,20.69 11.281,20.69 11.281,21.999
  pour cut-out: 13.125,21.975 13.125,22.825 10.125,22.825 10.125,21.975
GND:
  pour cut-out: 3,-3
  pour cut-out: 4,0 4,28 2,28 2,0
VM:
  pour cut-out: 5,28 7.75,28 7.75,22 5,22
  pour cut-out: 4,0 2,0 2,28 4,28
Bottom:
  pour cut-out: 2,28 3.81,28 3.81,0 2,0

## Silkscreen, mask and mechanical layers (free items; w line width, h text height)
Top Overlay:
  drawing of 6 lines, arcs and shapes, not listed
  text "+VM" at 33.449,26.3 h0.81
  text "GND" at 33.542,23.766 h0.81
  text "SDI" at 5.025,21.183 h0.81
  text "B2" at 33.971,21.175 h1.02
  text "SDO" at 5.025,18.643 h0.81
  text "B1" at 34.325,18.548 h1.02
  text "RFL" at 5.025,16.103 h0.81
  text "A2" at 33.915,16.032 h1.02
  text "RFR" at 5.025,13.563 h0.81
  text "A1" at 34.288,13.442 h1.02
  text "GND" at 33.524,10.963 h0.81
  text "GND" at 5.025,8.483 h0.81
  text "+VM" at 33.412,8.485 h0.81
  text "A" at 35.555,6.196 h0.81 r90
  text "DG0" at 5.025,5.943 h0.81
  text "B" at 35.647,3.619 h0.81 r90
  text "DG1" at 5.105,3.323 h0.81
  text "ENCODER" at 34.29,1.545 h0.7 r90
  text "N" at 35.632,0.981 h0.81 r90
  text "EN" at 5.105,0.783 h0.81
Bottom Overlay:
  lines w0.203: 35.56,12.7 35.56,22.86
  text "+VM" at 35.024,26.287 h0.81
  text "CSN" at 10.337,26.257 h0.81
  text "GND" at 13.507,26.202 h0.81
  text "CLK16" at 14.988,23.931 h0.81
  text "SCK" at 10.226,23.838 h0.81
  text "GND" at 34.931,23.753 h0.81
  text "SDI" at 8.028,21.164 h0.81
  text "B2" at 34.502,21.162 h1.02
  text "SDO" at 8.028,18.624 h0.81
  text "B1" at 34.148,18.535 h1.02
  text "RFL" at 8.028,16.084 h0.81
  text "A2" at 34.558,16.019 h1.02
  text "RFR" at 8.028,13.544 h0.81
  text "A1" at 34.185,13.429 h1.02
  text "GND" at 34.949,10.95 h0.81
  text "12V" at 7.986,10.941 h0.81
  text "GND" at 8.028,8.464 h0.81
  text "+VM" at 35.061,8.472 h0.81
  text "A" at 32.917,6.183 h0.81 r270
  text "DG0" at 8.028,5.924 h0.81
  text "B" at 32.826,3.606 h0.81 r270
  text "DG1" at 7.948,3.304 h0.81
  text "ENCODER" at 34.183,1.532 h0.7 r270
  text "OSV - OL  / STEPPER DRIVER /  / Driver:TMC5160A / +VM: 12 - 55V / Iph, RMS: 2.8A /  / Designer / Nadim Conti" at 31.366,1.442 h1.5
  text "N" at 32.841,0.968 h0.81 r270
  text "EN" at 7.948,0.764 h0.81
TopAsm:
  text ".BoardVersion" at 2.95,10.058 h1.02 r270

## Dimensions
38.1,27.94 to 2,27 on Dimension
38.1,0 to 36.83,27.94 on Dimension
36.83,1.27 to 36.83,3.81 on Dimension
3.81,1.27 to 36.83,1.27 on Dimension